# Altium PCB STC8GandH-TSSOP20-DIP20.PcbDoc
Units mm, origin at the board's own origin, x right, y up, seen from the top; angles counter-clockwise.
Board outline 17.8 x 26 mm, 2 copper layers (Top Layer, Bottom Layer); 10 components, 1 nets, 60 pads, 9 vias.
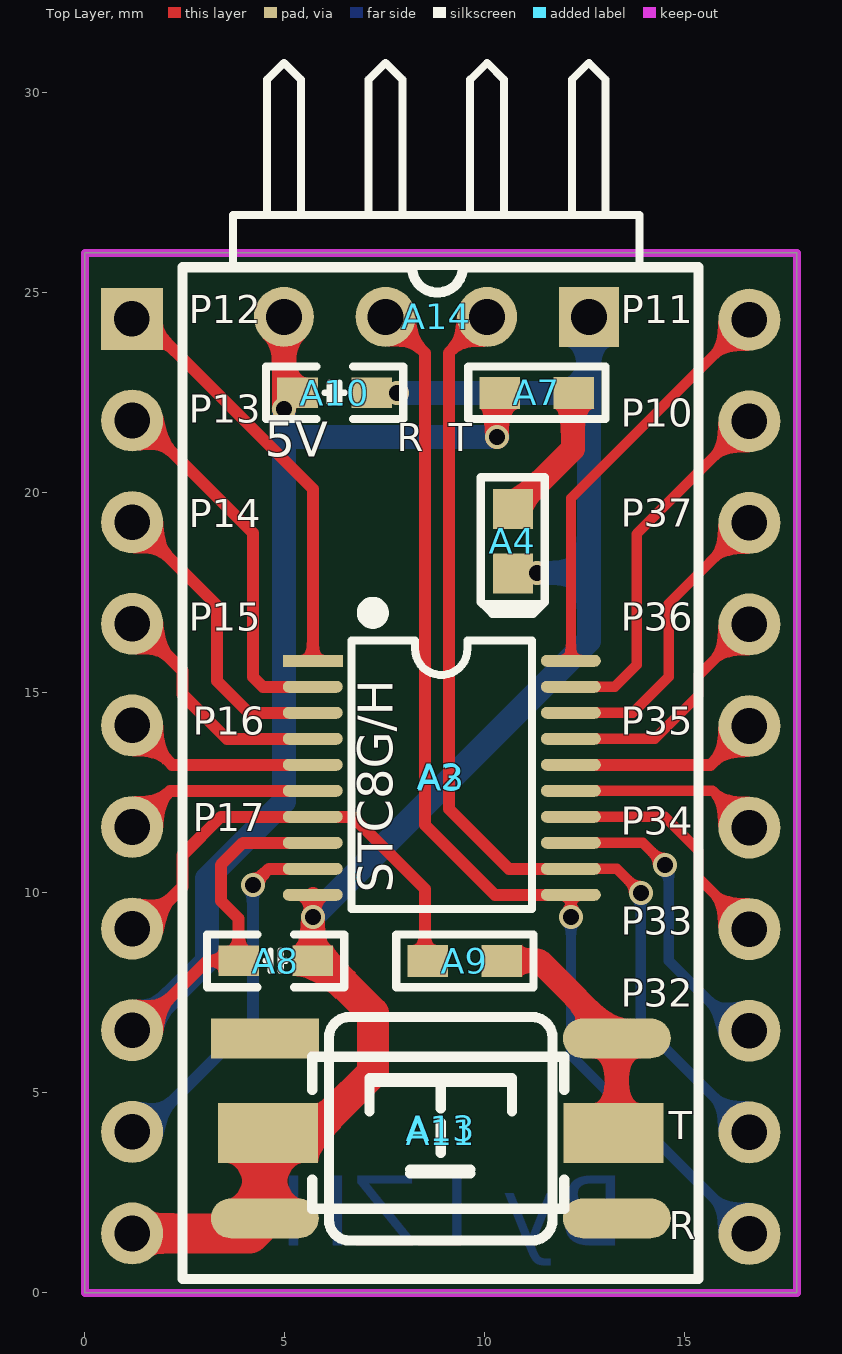
[diagram p0: Top Layer view]
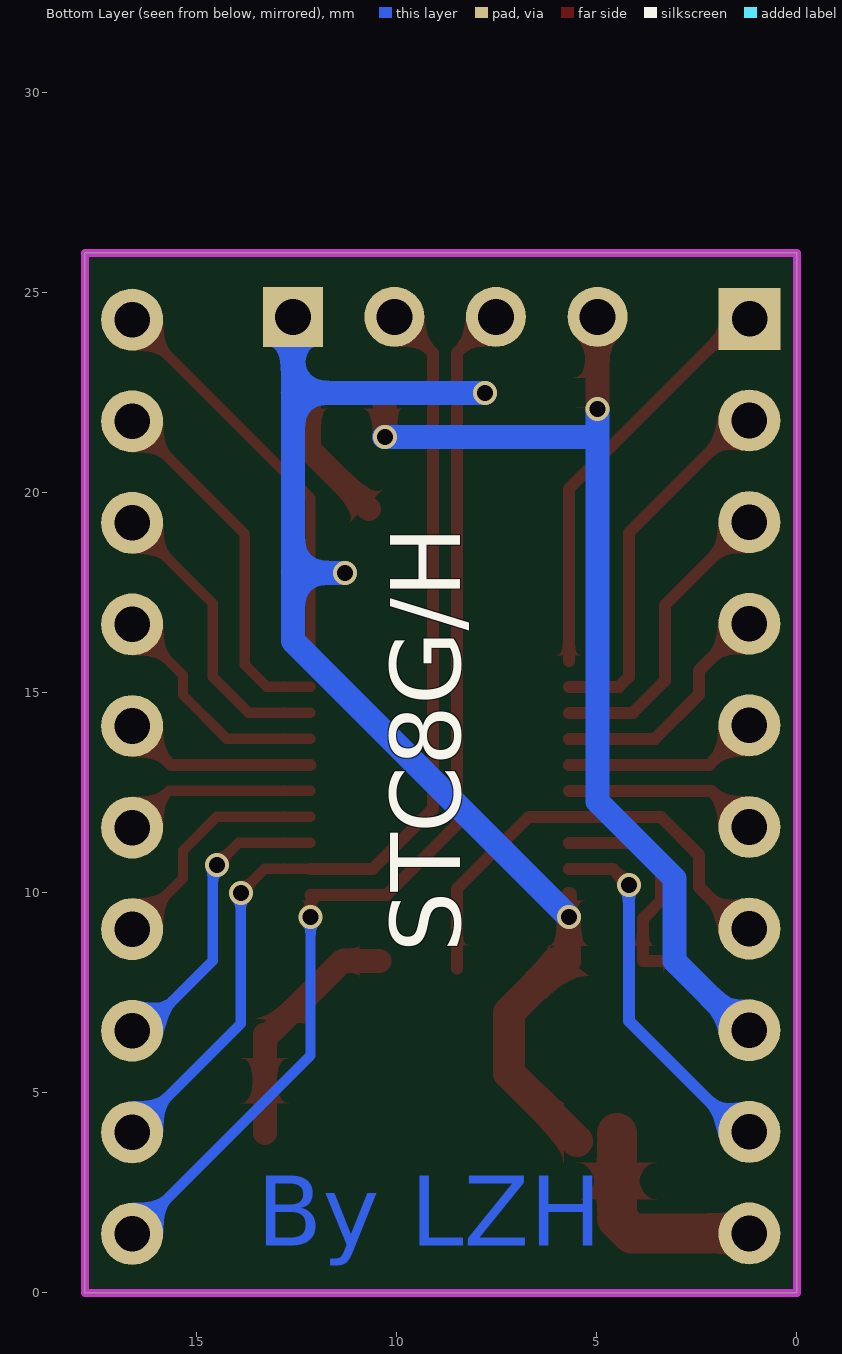
[diagram p1: Bottom Layer view, seen from below]

## Layer stack, top to bottom
Top Solder: solder mask 0.0102, Solder Resist, Dk 3.5
Top Layer: signal copper 0.0356
Dielectric1: dielectric 0.32, FR-4, Dk 4.8
Bottom Layer: signal copper 0.0356
Bottom Solder: solder mask 0.0102, Solder Resist, Dk 3.5

## Board outline
0,0 17.8,0 17.8,26 0,26

## Design rules (kind name [scope] priority, off if disabled: settings)
AssemblyTestPointUsage [All] p1 off:
AssemblyTestpoint [All] p1 off: testpointundercomponent=TRUE minsize=1.016 maxsize=2.54 preferedsize=1.524 minholesize=0 maxholesize=1.016 preferedholesize=0.813 testpointgrid=0.025 usegrid=TRUE gridtolerance=0 allowsidetop=TRUE allowsidebottom=TRUE
Clearance [All] p1: gap=0.254 ignorepadtopadclearanceinfootprint=FALSE except(0: Arc-Hole Track-Hole SMDPad-Hole THPad-Hole Via-Hole Fill-Hole Poly-Hole Region-Hole Text-Hole)
ComponentClearance [All] p1 off: gap=0.254 collisioncheckmode=3 verticalgap=0.254 showdistances=FALSE
DiffPairsRouting [All] p1: maxlimit=0.254 minlimit=0.254 mostfreqgap=0.254 substack1={A281F191-B1D2-4BED-AD7F-087E7E637DB1} toplayer_{a281f191-b1d2-4bed-ad7f-087e7e637db1}_minwidth=0.381 toplayer_{a281f191-b1d2-4bed-ad7f-087e7e637db1}_maxwidth=0.381 toplayer_{a281f191-b1d2-4bed-ad7f-087e7e637db1}_prefwidth=0.381 bottomlayer_{a281f191-b1d2-4bed-ad7f-087e7e637db1}_minwidth=0.381 bottomlayer_{a281f191-b1d2-4bed-ad7f-087e7e637db1}_maxwidth=0.381 bottomlayer_{a281f191-b1d2-4bed-ad7f-087e7e637db1}_prefwidth=0.381 substack2={7696FB82-BF94-4C7C-8F4D-0F08051AB496} toplayer_{7696fb82-bf94-4c7c-8f4d-0f08051ab496}_minwidth=0.381 toplayer_{7696fb82-bf94-4c7c-8f4d-0f08051ab496}_maxwidth=0.381 toplayer_{7696fb82-bf94-4c7c-8f4d-0f08051ab496}_prefwidth=0.381 bottomlayer_{7696fb82-bf94-4c7c-8f4d-0f08051ab496}_minwidth=0.381 bottomlayer_{7696fb82-bf94-4c7c-8f4d-0f08051ab496}_maxwidth=0.381 bottomlayer_{7696fb82-bf94-4c7c-8f4d-0f08051ab496}_prefwidth=0.381 substack3={308D4DBB-049D-4625-BA6D-14B08396AEED} toplayer_{308d4dbb-049d-4625-ba6d-14b08396aeed}_minwidth=0.381 toplayer_{308d4dbb-049d-4625-ba6d-14b08396aeed}_maxwidth=0.381 toplayer_{308d4dbb-049d-4625-ba6d-14b08396aeed}_prefwidth=0.381 bottomlayer_{308d4dbb-049d-4625-ba6d-14b08396aeed}_minwidth=0.381 bottomlayer_{308d4dbb-049d-4625-ba6d-14b08396aeed}_maxwidth=0.381 bottomlayer_{308d4dbb-049d-4625-ba6d-14b08396aeed}_prefwidth=0.381 substack4={89C28B19-DC30-49A4-ABCB-C317802E99A9} toplayer_{89c28b19-dc30-49a4-abcb-c317802e99a9}_minwidth=0.381 toplayer_{89c28b19-dc30-49a4-abcb-c317802e99a9}_maxwidth=0.381 toplayer_{89c28b19-dc30-49a4-abcb-c317802e99a9}_prefwidth=0.381 bottomlayer_{89c28b19-dc30-49a4-abcb-c317802e99a9}_minwidth=0.381 bottomlayer_{89c28b19-dc30-49a4-abcb-c317802e99a9}_maxwidth=0.381 bottomlayer_{89c28b19-dc30-49a4-abcb-c317802e99a9}_prefwidth=0.381 toplayer_minwidth=0.381 toplayer_maxwidth=0.381 toplayer_prefwidth=0.381 bottomlayer_minwidth=0.381 bottomlayer_maxwidth=0.381 bottomlayer_prefwidth=0.381 substack5={7DD4F679-E7CA-4E44-8736-CEE6FCA21A12} toplayer_{7dd4f679-e7ca-4e44-8736-cee6fca21a12}_minwidth=0.381 toplayer_{7dd4f679-e7ca-4e44-8736-cee6fca21a12}_maxwidth=0.381 toplayer_{7dd4f679-e7ca-4e44-8736-cee6fca21a12}_prefwidth=0.381 bottomlayer_{7dd4f679-e7ca-4e44-8736-cee6fca21a12}_minwidth=0.381 bottomlayer_{7dd4f679-e7ca-4e44-8736-cee6fca21a12}_maxwidth=0.381 bottomlayer_{7dd4f679-e7ca-4e44-8736-cee6fca21a12}_prefwidth=0.381 substack6={0CC8949F-CB3B-4A79-8F49-3E69797241F0} toplayer_{0cc8949f-cb3b-4a79-8f49-3e69797241f0}_minwidth=0.381 toplayer_{0cc8949f-cb3b-4a79-8f49-3e69797241f0}_maxwidth=0.381 toplayer_{0cc8949f-cb3b-4a79-8f49-3e69797241f0}_prefwidth=0.381 bottomlayer_{0cc8949f-cb3b-4a79-8f49-3e69797241f0}_minwidth=0.381 bottomlayer_{0cc8949f-cb3b-4a79-8f49-3e69797241f0}_maxwidth=0.381 bottomlayer_{0cc8949f-cb3b-4a79-8f49-3e69797241f0}_prefwidth=0.381 substack7={9E20B110-FAD4-4A38-8255-FB5905081E1E} toplayer_{9e20b110-fad4-4a38-8255-fb5905081e1e}_minwidth=0.381 toplayer_{9e20b110-fad4-4a38-8255-fb5905081e1e}_maxwidth=0.381 toplayer_{9e20b110-fad4-4a38-8255-fb5905081e1e}_prefwidth=0.381 bottomlayer_{9e20b110-fad4-4a38-8255-fb5905081e1e}_minwidth=0.381 bottomlayer_{9e20b110-fad4-4a38-8255-fb5905081e1e}_maxwidth=0.381 bottomlayer_{9e20b110-fad4-4a38-8255-fb5905081e1e}_prefwidth=0.381 maxuncoupledlength=12.7
FabricationTestPointUsage [All] p1 off: valid=0 allowmultiple=FALSE
FabricationTestpoint [(IsPad And (OnTopLayer Or OnBottomLayer))] p1 off: side=3 testpointundercomponent=TRUE minsize=1.016 maxsize=2.54 preferedsize=1.524 minholesize=0 maxholesize=1.016 preferedholesize=0.813 testpointgrid=0.025 allowsidetop=TRUE allowsidebottom=TRUE usegrid=TRUE gridtolerance=0
Height [All] p1 off: minheight=0 maxheight=25.4 prefheight=12.7
PolygonConnect [All] p1: connectstyle=Direct reliefconductorwidth=0.254 reliefentries=4 polygonreliefangle="90 Angle" airgapwidth=0.254
RoutingCorners [All] p1: cornerstyle=45-Degree minsetback=1.016 maxsetback=1.016
RoutingVias [All] p1: holewidth=0.711 width=1.27 viastyle="Through Hole" minholewidth=0.711 minwidth=1.27 maxholewidth=0.711 maxwidth=1.27
SolderMaskExpansion [All] p1: expansion=0.102 istentingtop=FALSE
Width [All] p1: maxlimit=2.54 minlimit=0.254 preferedwidth=0.254 substack1={A281F191-B1D2-4BED-AD7F-087E7E637DB1} substack2={7696FB82-BF94-4C7C-8F4D-0F08051AB496} substack3={308D4DBB-049D-4625-BA6D-14B08396AEED} substack4={89C28B19-DC30-49A4-ABCB-C317802E99A9} substack5={7DD4F679-E7CA-4E44-8736-CEE6FCA21A12} substack6={0CC8949F-CB3B-4A79-8F49-3E69797241F0} substack7={9E20B110-FAD4-4A38-8255-FB5905081E1E}
22 further rules are at their usual default settings.

## Components (designator, comment, footprint, x,y, rotation, side; value= is the part's Value field where it differs from the comment)
A2 "Comment" DIP-20-wide 1.179,24.347 r0 top locked
A3 "Comment" TSSOP20 5.7,15.8 r0 top locked
A4 "Comment" "0603LED B" 10.7,19.5 r270 top
A7 "Comment" "R 0603_M" 11.3,22.5 r180 top
A8 "Comment" "C 0603_M" 4.773,8.3 r0 top
A9 "Comment" "R 0603_M" 9.5,8.3 r0 top
A10 "Comment" "C 0603_M" 6.246,22.5 r180 top
A11 "Comment" "TSW SMD-3*6*4.3" 8.9,4 r0 top
A13 "Comment" "TSW SMD-6*6*5" 8.9,4.1 r0 top
A14 "Comment" HDR1X4H 12.6,24.4 r180 top

## Footprints (in the part's own frame and the unit in brackets; to place one, negate y for a bottom-side part, rotate by r counter-clockwise, add the part's x,y. Pads: shape width x height; smd on the part's side, far side on the other; paste and mask are expansions set on the pad)
"0603LED B" [mm]
  rect 1x1 smd: 1(-0.099,0) 2(1.521,0)
  silkscreen extent -0.89,-0.8 2.51,0.8, body extent -0.1,-0.4 1.52,0.4, height 0.6
"C 0603_M" [mil] "无极性贴片电容"
  rect 40x30 smd: 1(-36.5,0) 2(36.5,0)
  silkscreen extent -68,-26 68,26, body extent -31,-16 31,16, height 32
DIP-20-wide [mil] "STC8G1K17-38I-TSSOP20"
  rect 61x61 hole 35: 1(0,0)
  round 61 hole 35: 2(0.25,-100.02) 3(0.25,-200.04) 4(0.25,-300.06) 5(0.25,-400.08) 6(0.25,-500.1) 7(0.25,-600.12) 8(0.25,-700.14) 9(0.25,-800.16) 10(0.25,-900.18) 11(607.75,-900.59) 12(607.75,-800.62) 13(607.75,-700.64) 14(607.75,-600.66) 15(607.75,-500.68) 16(607.75,-400.7) 17(607.75,-300.73) 18(607.75,-200.75) 19(607.75,-100.77) 20(607.75,-0.79)
  silkscreen extent 50,-945 558,51
HDR1X4H [mm] "Connector; Header; 4 Position; Right Angle"
  rect 1.5x1.5 hole 0.9: 1(0,0)
  round 1.5 hole 0.9: 2(2.54,0) 3(5.08,0) 4(7.62,0)
  silkscreen extent -1.27,-6.35 8.89,-1.27, body extent -1.27,-10 8.89,0.35, height 2.54
"R 0603_M" [mil] "1/10W贴片电阻"
  rect 40x31.5 smd: 1(-36.5,0) 2(36.5,0)
  silkscreen extent -68,-26 68,26, body extent -31,-16 32,16, height 16
TSSOP20 [mm]
  rect 1.5x0.3 smd: 1(0,0)
  oval 1.5x0.3 smd: 2(0,-0.65) 3(0,-1.3) 4(0,-1.95) 5(0,-2.6) 6(0,-3.25) 7(0,-3.9) 8(0,-4.55) 9(0,-5.2) 10(0,-5.85) 11(6.454,-5.85) 12(6.454,-5.2) 13(6.454,-4.55) 14(6.454,-3.9) 15(6.454,-3.25) 16(6.454,-2.6) 17(6.454,-1.95) 18(6.454,-1.3) 19(6.454,-0.65) 20(6.454,0)
  silkscreen extent 0.97,-6.2 5.49,0.51, body extent -0.05,-6.22 6.5,0.38, height 1.2
"TSW SMD-3*6*4.3" [mm] "3*6*4.3mm"
  rect 2.5x1.5 smd: 1(-4.318,0) 2(4.318,0)
  silkscreen extent -3.21,-1.9 3.09,1.9, body extent -4.6,-1.75 4.6,1.75, height 4.4
"TSW SMD-6*6*5" [mm] "6*6*5mm"
  rect 2.7x1 smd: 1(-4.4,2.261)
  oval 2.7x1 smd: 2(-4.4,-2.239) 3(4.4,-2.239) 4(4.4,2.261)
  silkscreen extent -2.79,-2.79 2.79,2.79, body extent -4.5,-3 4.5,3, height 4.95

## Via types
v1: diameter 0.6, hole 0.4, Top Layer to Bottom Layer, 9 vias

## Nets (pads, with @x,y where several pads share a name; then routed paths per layer and width w, separated by ;. In a path a pad name is that pad's centre, name@x,y a point inside that pad or via, vN(x,y) a via of type N, cw(c..) or ccw(c..) an arc to the next point about the centre after c; other vN are vias at no path point)
GND: 
pads on no net: A2.1 A2.2 A2.3 A2.4 A2.5 A2.6 A2.7 A2.8 A2.9 A2.10 A2.11 A2.12 A2.13 A2.14 A2.15 A2.16 A2.17 A2.18 A2.19 A2.20 A3.1 A3.2 A3.3 A3.4 A3.5 A3.6 A3.7 A3.8 A3.9 A3.10 A3.11 A3.12 A3.13 A3.14 A3.15 A3.16 A3.17 A3.18 A3.19 A3.20 A4.1 A4.2 A7.1 A7.2 A8.1 A8.2 A9.1 A9.2 A10.1 A10.2 A11.1 A11.2 A13.1 A13.2 A13.3 A13.4 A14.1 A14.2 A14.3 A14.4
copper on no net: | length 255.4
  Top Layer w0.254: v1(12.154,9.4) 12.154,9.95 ; 12.154,10.6 13.3,10.6 v1(13.9,10) ; 12.154,11.25 13.95,11.25 v1(14.5,10.7) ; 12.154,11.9 14.5,11.9 15.346,11.054 15.346,10.36 16.616,9.09 ; 12.154,12.55 15.696,12.55 16.616,11.63 ; 12.154,13.85 14.25,13.85 15.346,14.946 15.346,15.439 16.616,16.709 ; 12.154,14.5 13.7,14.5 14.6,15.4 14.6,17.232 16.616,19.248 ; 12.154,15.15 13.25,15.15 13.8,15.7 13.8,18.972 16.616,21.787 ; 12.154,15.8 12.154,19.865 16.616,24.327 ; 16.349,6.551 16.616,6.551
  Top Layer w0.3: 1.179,24.347 1.179,24.4 1.4,24.4 5.7,20.1 5.7,15.8 ; 1.185,1.482 1.482,1.482 ; 1.185,4.023 1.423,4.023 ; 1.185,6.563 1.324,6.563 3.061,8.3 3.846,8.3 3.846,9.354 3.4,9.8 3.4,10.7 3.95,11.25 5.7,11.25 ; 1.185,9.104 1.404,9.104 2.445,10.145 2.445,10.945 3.4,11.9 5.7,11.9 6.7,11.9 8.5,10.1 8.5,8.107 ; 1.185,11.644 1.185,11.6 2.135,12.55 5.7,12.55 ; 1.185,14.185 1.185,14.2 2.185,13.2 5.7,13.2 ; 1.185,19.266 1.185,19.3 3.3,17.185 3.3,15.3 4.1,14.5 5.7,14.5 ; 1.185,21.806 1.185,21.8 1.4,21.8 4.2,19 4.2,15.4 4.45,15.15 5.7,15.15 ; 1.23,16.77 2.445,15.555 2.445,14.955 3.55,13.85 5.7,13.85 ; v1(4.2,10.2) 4.6,10.6 5.7,10.6 ; 7.52,24.4 7.6,24.4 8.5,23.5 8.5,11.7 10.25,9.95 12.154,9.95 ; 10.06,24.4 10,24.4 9.1,23.5 9.1,12.1 10.6,10.6 12.154,10.6 ; 12.154,13.2 15.647,13.2 16.616,14.169
  Top Layer w0.4: v1(5.7,9.4) 5.7,9.95
  Top Layer w0.6: v1(4.98,22.1) 4.98,24.4 ; 5.7,8.3 v1(5.7,9.4) ; v1(10.3,21.4) 10.3,22.5 ; 10.427,8.3 11.361,8.3 13.3,6.361 ; 10.7,19.599 12.2,21.099 12.2,22.5 ; 13.3,4 13.3,6.461
  Top Layer w0.8: 5.5,3.8 7.2,5.5 7.2,7 5.9,8.3
  Top Layer w1: 1.185,1.482 4.122,1.482 4.5,1.861 ; 4.5,2.1 4.5,4
  Bottom Layer w0.254: v1(12.154,9.4) 12.154,5.934 16.616,1.472 ; v1(13.9,10) 13.9,6.727 16.616,4.011 ; v1@14.6,10.7 14.6,8.3 16.349,6.551
  Bottom Layer w0.3: 1.423,4.023 4.2,6.8 v1(4.2,10.2)
  Bottom Layer w0.6: 1.185,6.563 1.324,6.563 3.058,8.297 3.058,10.358 4.98,12.28 4.98,21.4 4.98,21.84 v1(4.98,22.1) ; 5,21.4 v1@10.319,21.4 ; v1(5.7,9.4) 12.6,16.3 12.6,18 ; v1(7.8,22.5) 12.6,22.5 ; v1(11.3,18) 12.6,18 ; 12.6,24.4 12.6,22.5 ; 12.6,18 12.6,22.5

## Keep-outs
Keep-Out Layer:
  the board outline again, w0.2

## Other copper
Bottom Layer:
  text "By LZH" at 13.5,0.6 h3

## Silkscreen, mask and mechanical layers (free items; w line width, h text height)
Top Overlay:
  circle w0.6: c7.2,17 r0.1
  text "P12" at 2.6,24 h1.2
  text "P11" at 13.4,24 h1.2
  text "P13" at 2.6,21.514 h1.2
  text "P10" at 13.4,21.414 h1.2
  text "R" at 7.8,20.8 h1.2
  text "T" at 9.1,20.8 h1.2
  text "5V" at 4.5,20.618 h1.5
  text "P14" at 2.6,18.9 h1.2
  text "P37" at 13.4,18.914 h1.2
  text "P15" at 2.6,16.314 h1.2
  text "P36" at 13.4,16.314 h1.2
  text "P16" at 2.7,13.714 h1.2
  text "P35" at 13.4,13.714 h1.2
  text "P17" at 2.7,11.3 h1.2
  text "P34" at 13.4,11.214 h1.2
  text "STC8G/H" at 7.982,10 h1.5 r90
  text "P33" at 13.4,8.714 h1.2
  text "P32" at 13.4,6.914 h1.2
  text "T" at 14.6,3.6 h1.2
  text "R" at 14.6,1.1 h1.2
Bottom Overlay:
  text "STC8G/H" at 7.836,8.5 h3 r270
Mechanical 15:
  lines w0.003: 41.591,8.717 41.641,8.768